# Altium PCB PCB1.PcbDoc (part 1 of 2)
Units mm, origin at the board's own origin, x right, y up, seen from the top; angles counter-clockwise.
Board outline 166.37 x 130.3 mm, 2 copper layers (Top Layer, Bottom Layer); 89 components, 70 nets, 277 pads, 63 vias.
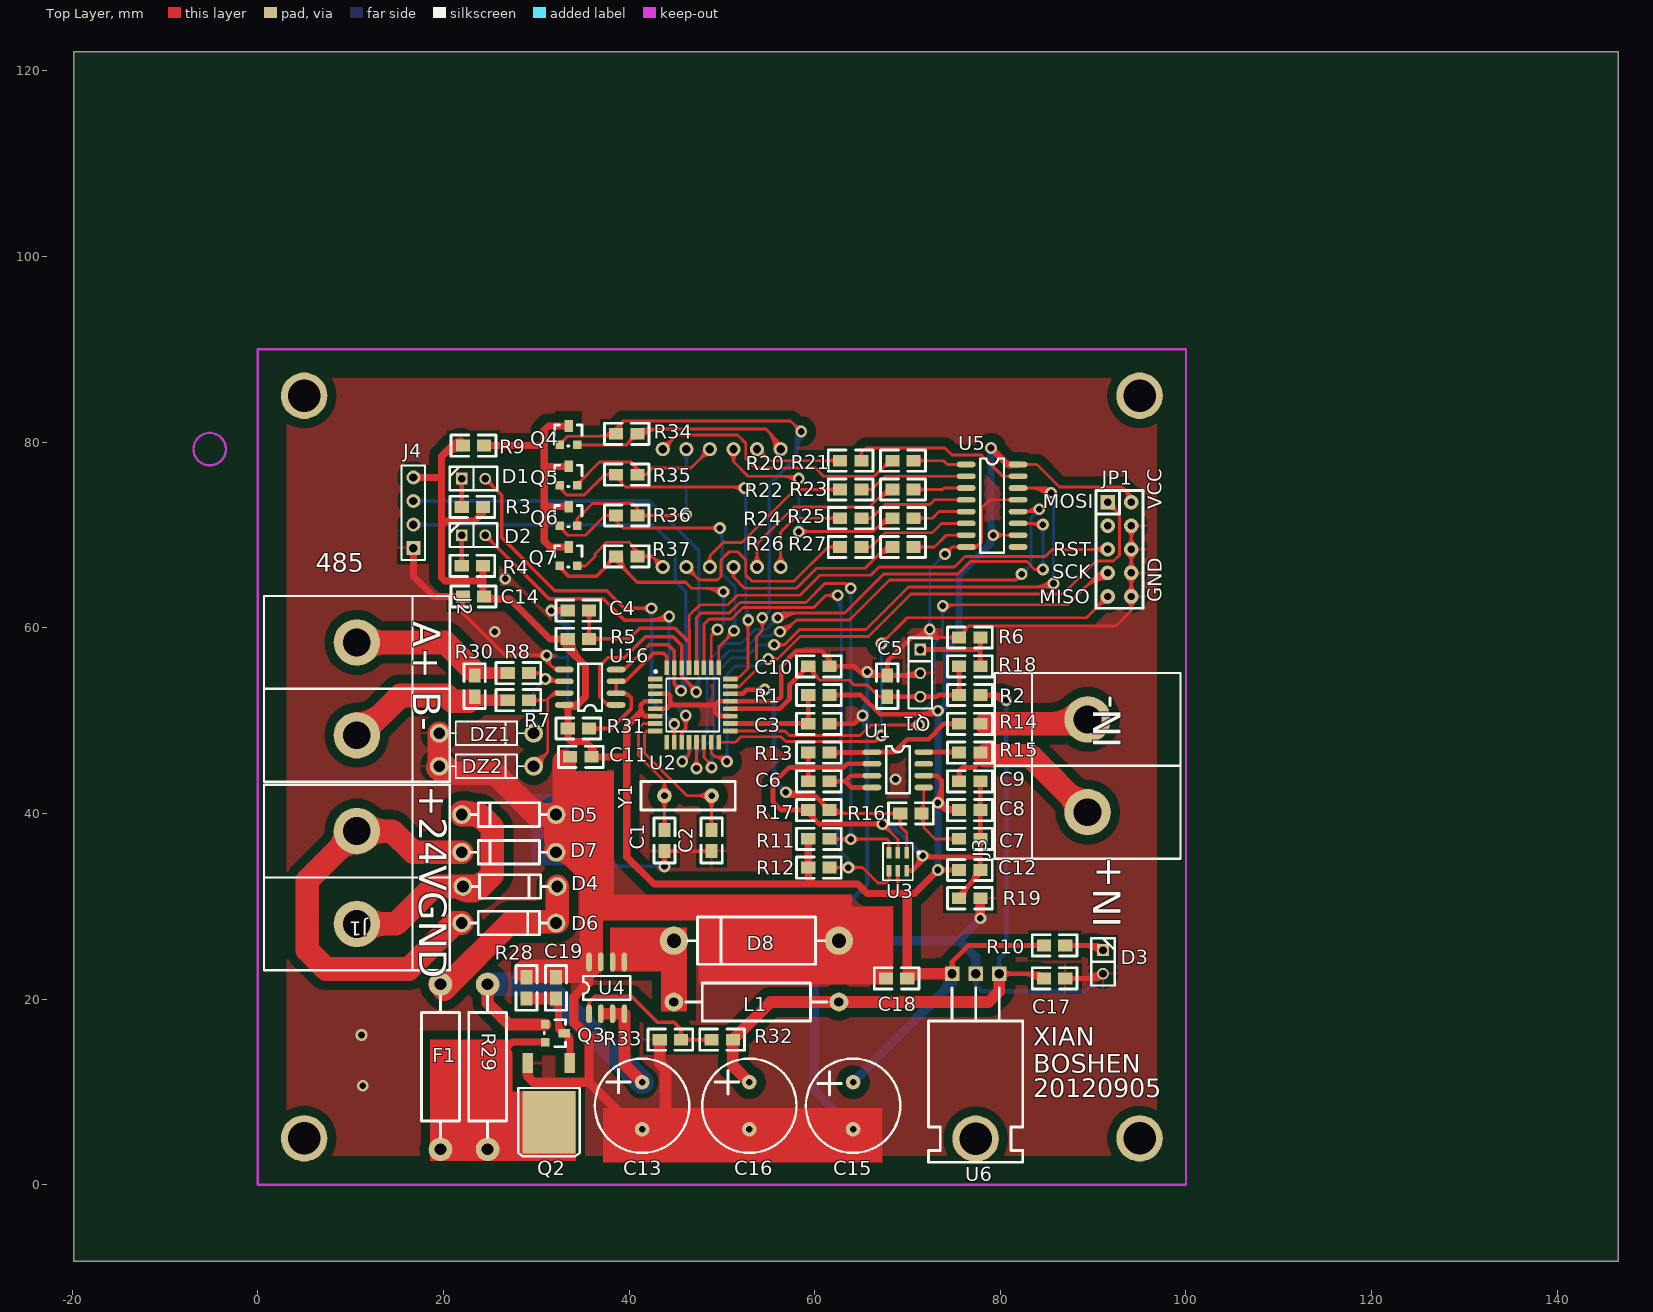
[diagram p0: Top Layer view]
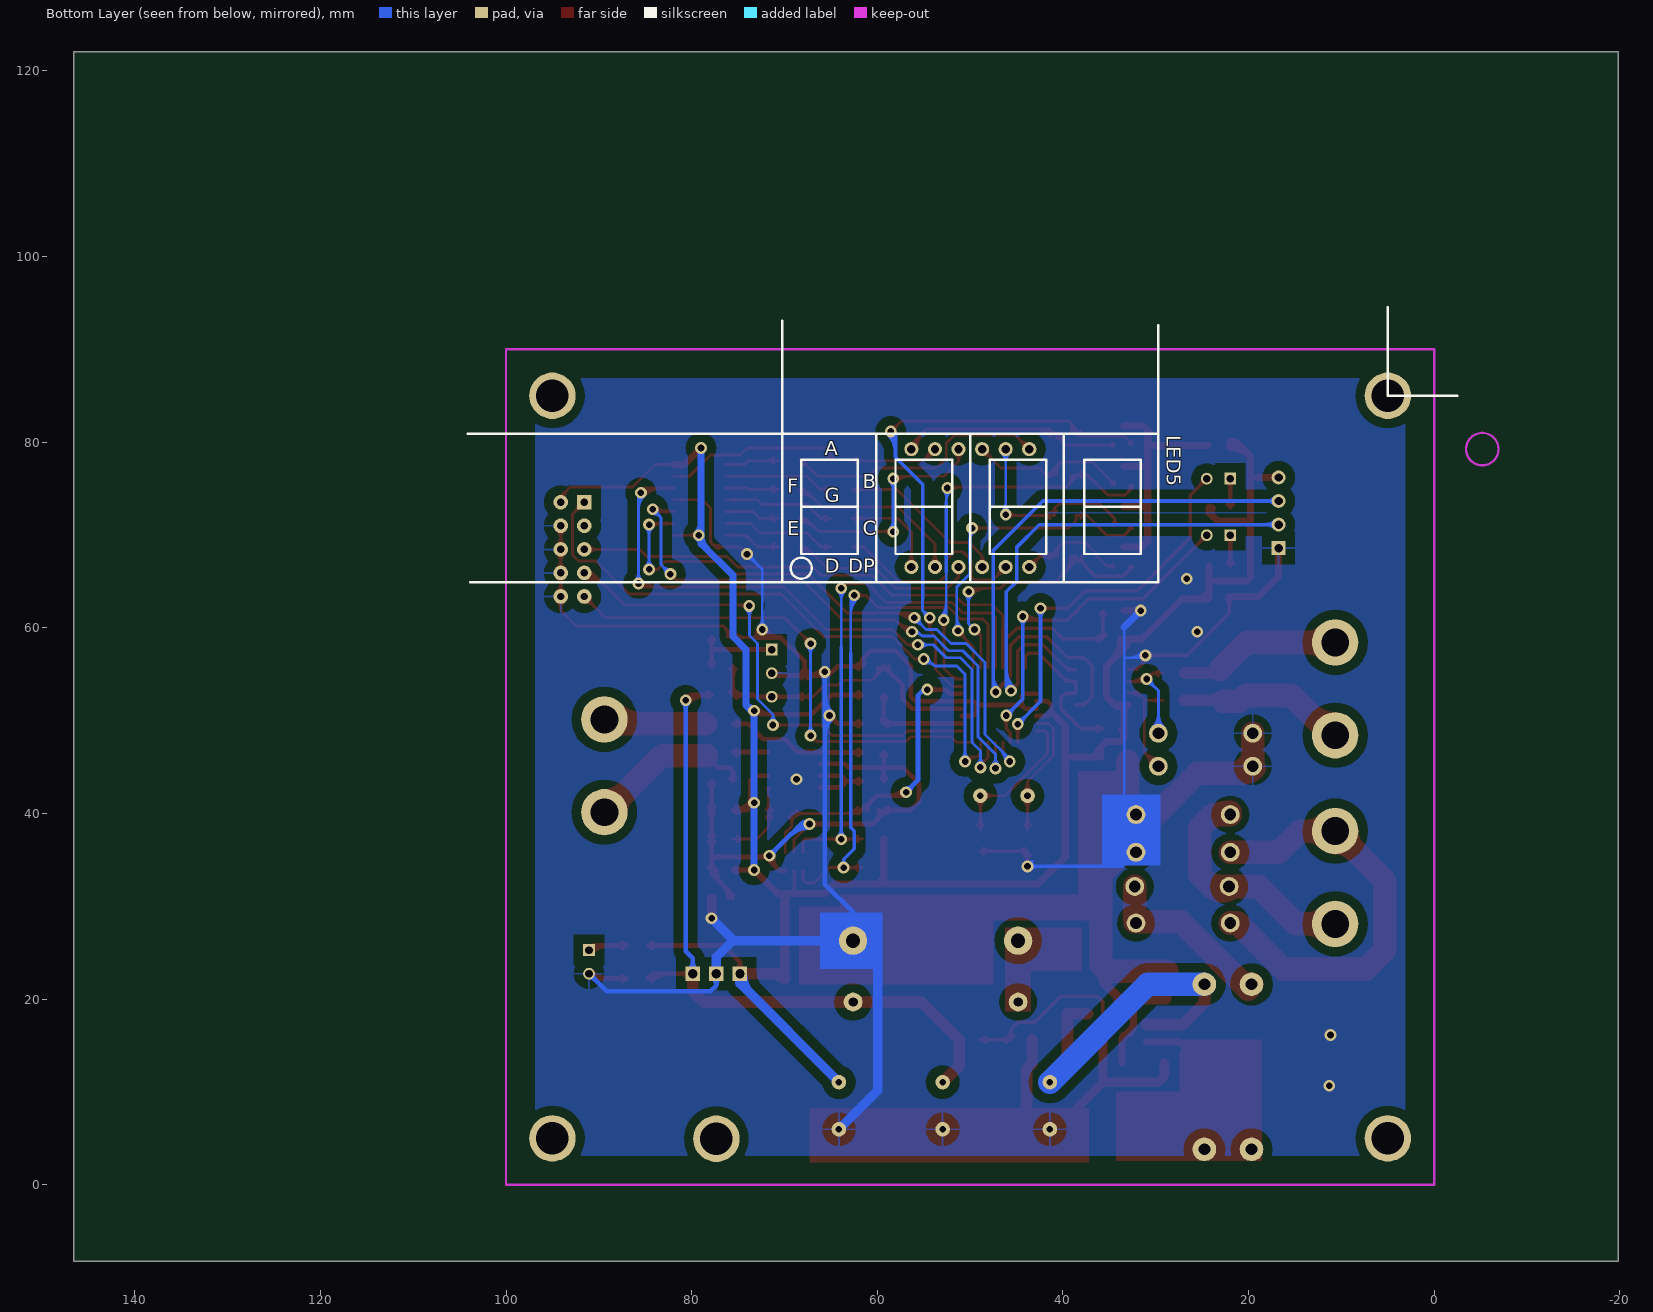
[diagram p1: Bottom Layer view, seen from below]

## Layer stack, top to bottom
Top Layer: signal copper 0.0356
Dielectric: dielectric 0.32, FR-4, Dk 4.8
Bottom Layer: signal copper 0.0356

## Board outline
-19.812,106.426 -19.812,-8.255 146.558,-8.255 146.558,122.047 -19.812,122.047

## Design rules (kind name [scope] priority, off if disabled: settings)
Clearance poly [(InPolygon)] p1: gap=1
Clearance Clearance_2 [All] p2: gap=0.254
ComponentClearance [All] p1: gap=0.254 collisioncheckmode=0
HoleSize [All] p1: absolutevalues=TRUE maxlimit=25.4 minlimit=0.025 maxpercent=80.000 minpercent=20.000
PolygonConnect [All] p1: connectstyle=Relief reliefconductorwidth=0.254 reliefentries=4 polygonreliefangle="90 Angle"
RoutingVias [All] p1: holewidth=0.711 width=1.27 viastyle="Through Hole" minholewidth=0.711 minwidth=1.27 maxholewidth=0.711 maxwidth=1.27
SolderMaskExpansion [All] p1: expansion=0.102
TestPointUsage [All] p1: valid=0 allowmultiple=FALSE
Testpoint [All] p1: side=15 testpointundercomponent=TRUE minsize=1.016 maxsize=2.54 preferedsize=1.524 minholesize=0 maxholesize=1.016 preferedholesize=0.813 testpointgrid=0.025 style=1023 order=-539222988
Width [All] p1: maxlimit=25.4 minlimit=0.305 preferedwidth=0.381 toplayer_prefwidth=0.762 bottomlayer_prefwidth=0.305 minimp=50.000000 maximp=50.000000 favimp=50.000000
16 further rules are at their usual default settings.

## Components (designator, comment, footprint, x,y, rotation, side; value= is the part's Value field where it differs from the comment)
C1 "15pF" 0805 43.815,35.941 r90 top
C2 "15pF" 0805 48.895,35.941 r90 top
C3 "0.1uF" 0805 59.309,49.657 r0 top
C4 "1uF" 0805 35.687,61.849 r180 top
C5 "0.1uF" 0805 67.818,52.578 r90 top
C6 "103" 0805 61.595,43.459 r180 top
C7 "104" 0805 75.565,37.262 r0 top
C8 "104" 0805 77.851,40.361 r180 top
C9 "104" 0805 75.565,43.459 r0 top
C10 "0.1uF" 0805 59.309,55.855 r0 top
C11 "103" 0805 33.655,46.101 r0 top
C12 "103" 0805 77.851,33.909 r180 top
C13 "10uF" RB.2/.4 41.402,11.049 r90 top
C14 "Cap" 0805 22.098,63.373 r0 top
C15 "10uF" RB.2/.4 64.135,11.049 r90 top
C16 "47uF" RB.2/.4 52.959,11.049 r90 top
C17 "104独石" 0805 86.995,22.225 r180 top
C18 "104独石" 0805 67.691,22.225 r0 top
C19 "0.01uF" 0805 32.131,20.066 r90 top
D1 "LED" SIP2 21.971,76.073 r0 top
D2 "LED" SIP2 21.971,69.977 r0 top
D3 "LED" SIP2 91.059,25.273 r270 top
D4 "1N4007" DIODE0.4 22.098,32.131 r0 top
D5 "1N4007" DIODE0.4 32.131,39.878 r180 top
D6 "1N4007" DIODE0.4 21.971,28.194 r0 top
D7 "1N4007" DIODE0.4 32.131,35.814 r180 top
D8 "5822" DIODE0.7 62.611,26.289 r180 top
DZ1 "P6KE10A" DIODE-0.4 24.638,48.641 r0 top
DZ2 "P6KE10A" DIODE-0.4 24.638,45.085 r0 top
F1 "1A" AXIAL0.7#1 19.685,3.81 r90 top
J1 "Power" duanzi 10.668,38.1 r270 top
J2 "485" duanzi 10.668,58.42 r270 top
J3 "4-20mA" duanzi 89.408,40.132 r90 top
J4 "Uart" HDR1X4 16.764,68.58 r90 top
JP1 "HEADER 5X2" IDC10 91.567,73.533 r270 top
L1 "22uH" AXIAL0.7#2 44.831,19.685 r0 top
LED5 "SR*410402" SR410402 70.231,64.897 r180 bottom
Q1 "431" sip3 71.374,57.658 r270 top
Q2 "IRFU024" TO-252AA 33.655,13.081 r180 top
Q3 "S8550LT1" SOT-23 30.988,17.272 r270 top
Q4 "SI2301" SOT-23 32.512,79.705 r0 top
Q5 "SI2301" SOT-23 32.512,75.362 r0 top
Q6 "SI2301" SOT-23 32.512,71.018 r0 top
Q7 "SI2301" SOT-23 32.512,66.675 r0 top
R1 "10uH" 0805 59.309,52.756 r0 top
R2 "1K" 0805 75.565,52.756 r0 top
R3 "1K" 0805 21.971,73.025 r0 top
R4 "1K" 0805 21.971,66.675 r0 top
R5 "10K" 0805 35.687,58.801 r180 top
R6 "1K" 0805 75.565,58.953 r0 top
R7 "100" 0805 26.924,52.197 r0 top
R8 "100" 0805 26.924,55.118 r0 top
R9 "0" 0805 22.098,79.629 r0 top
R10 "1K" 0805 86.995,25.781 r180 top
R11 "20K" 0805 61.595,37.262 r180 top
R12 "20K" 0805 61.595,34.163 r180 top
R13 "51" 0805 59.309,46.558 r0 top
R14 "5.1%0.1" 0805 75.565,49.657 r0 top
R15 "10" 0805 75.565,46.558 r0 top
R16 "5K" 0805 69.215,40.005 r0 top
R17 "5K" 0805 59.309,40.361 r0 top
R18 "0" 0805 75.565,55.855 r0 top
R19 "0" 0805 77.851,30.861 r180 top
R20 "200" 0805 65.024,78.003 r180 top
R21 "200" 0805 70.663,78.003 r180 top
R22 "200" 0805 65.024,74.905 r180 top
R23 "200" 0805 70.663,74.905 r180 top
R24 "200" 0805 65.024,71.806 r180 top
R25 "200" 0805 70.663,71.806 r180 top
R26 "200" 0805 65.024,68.707 r180 top
R27 "200" 0805 70.663,68.707 r180 top
R28 "10K" 0805 28.956,22.352 r270 top
R29 "1" AXIAL0.7#1 24.765,21.59 r270 top
R30 "120" 0805 23.368,52.578 r90 top
R31 "10K" 0805 35.687,49.149 r180 top
R32 "1K" 0805 48.895,15.621 r0 top
R33 "1K" 0805 43.307,15.621 r0 top
R34 "NC" 0805 38.608,80.899 r0 top
R35 "NC" 0805 38.608,76.496 r0 top
R36 "NC" 0805 38.608,72.094 r0 top
R37 "NC" 0805 38.608,67.691 r0 top
U1 "AD8200-YR" so-8 66.167,46.609 r0 top
U2 "ATmega8-16AC" 32A 46.863,51.689 r0 top
U3 "ADS1110A0" SO-G6/X.5 68.961,34.798 r180 top
U4 "DB1513" SO-8 35.687,18.415 r90 top
U5 "MC74HC595D" SO-16 76.327,77.597 r0 top
U6 "LM7805" TO-220 79.883,22.733 r180 top
U16 "MAX485ESA" SO-8 38.608,51.689 r180 top
Y1 "8M" XTAL1 48.895,41.91 r180 top

## Footprints (in the part's own frame and the unit in brackets; to place one, negate y for a bottom-side part, rotate by r counter-clockwise, add the part's x,y. Pads: shape width x height; smd on the part's side, far side on the other; paste and mask are expansions set on the pad)
32A [mm] "QFP; 32 Leads; Body 7 x 7 mm; Pitch 0.8 mm"
  rect 1.55x0.5 smd: 1(-4.025,2.8) 2(-4.025,2) 3(-4.025,1.2) 4(-4.025,0.4) 5(-4.025,-0.4) 6(-4.025,-1.2) 7(-4.025,-2) 8(-4.025,-2.8) 17(4.025,-2.8) 18(4.025,-2) 19(4.025,-1.2) 20(4.025,-0.4) 21(4.025,0.4) 22(4.025,1.2) 23(4.025,2) 24(4.025,2.8)
  rect 0.5x1.55 smd: 9(-2.8,-4.025) 10(-2,-4.025) 11(-1.2,-4.025) 12(-0.4,-4.025) 13(0.4,-4.025) 14(1.2,-4.025) 15(2,-4.025) 16(2.8,-4.025) 25(2.8,4.025) 26(2,4.025) 27(1.2,4.025) 28(0.4,4.025) 29(-0.4,4.025) 30(-1.2,4.025) 31(-2,4.025) 32(-2.8,4.025)
  silkscreen extent -4.12,-2.85 2.85,3.72
0805 [mil]
  rect 60x50 smd: 1(0,0) 2(90,0)
  silkscreen extent -50,-45 140,45
AXIAL0.7#1 [mm]
  round 2.54 hole 1.27: 1(0,0) 2(17.78,0)
  silkscreen extent 1.27,-2.03 16.51,2.03
AXIAL0.7#2 [mm]
  round 2.032 hole 1.016: 1(0,0) 2(17.78,0)
  silkscreen extent 1.27,-2.03 16.51,2.03
DIODE0.4 [mil]
  round 80 hole 50: 1(0,0) 2(400,0)
  silkscreen extent 40,-50 360,50
DIODE0.7 [mil]
  round 120 hole 60: 1(0,0) 2(700,0)
  silkscreen extent 60,-100 640,100
DIODE-0.4 [mil]
  round 80 hole 50: 1(-200,0) 2(200,0)
  silkscreen extent -160,-50 160,50
duanzi [mm]
  round 5 hole 3: 1(0,0) 2(10,0)
  silkscreen extent -5,-10 15,10
HDR1X4 [mm] "Connector; Header; 4 Position"
  rect 1.5x1.5 hole 0.9: 1(0,0)
  round 1.5 hole 0.9: 2(2.54,0) 3(5.08,0) 4(7.62,0)
  silkscreen extent -1.27,-1.27 8.89,1.27
IDC10 [mil]
  rect 62x62 hole 31.5: 1(0,0)
  round 62 hole 31.5: 2(0,100) 3(100,0) 4(100,100) 5(200,0) 6(200,100) 7(300,0) 8(300,100) 9(400,0) 10(400,100)
  silkscreen extent -50,-50 450,150
RB.2/.4 [mil]
  round 62 hole 28: 1(0,0) 2(-200,0)
  silkscreen extent -300,-200 100,200
SIP2 [mil]
  rect 50x50 hole 32: 1(0,0)
  round 50 hole 32: 2(100,0)
  silkscreen extent -50,-50 150,50
sip3 [mil]
  rect 50x50 hole 32: 1(0,0)
  round 50 hole 32: 2(100,0) 3(200,0)
  silkscreen extent -50,-50 250,50
so-8 [mil]
  oval 80x24 smd: 1(0,0) 2(0,-50) 3(0,-100) 4(0,-150) 5(220,-150) 6(220,-100) 7(220,-50) 8(220,0)
  silkscreen extent 60,-175 160,25
SO-8 [mil]
  oval 80x24 smd: 1(0,0) 2(0,-50) 3(0,-100) 4(0,-150) 5(220,-150) 6(220,-100) 7(220,-50) 8(220,0)
  silkscreen extent 60,-175 160,25
SO-16 [mil]
  oval 80x24 smd: 1(0,0) 2(0,-50) 3(0,-100) 4(0,-150) 5(0,-200) 6(0,-250) 7(0,-300) 8(0,-350) 9(220,-350) 10(220,-300) 11(220,-250) 12(220,-200) 13(220,-150) 14(220,-100) 15(220,-50) 16(220,0)
  silkscreen extent 60,-375 160,25
SO-G6/X.5 [mm]
  rect 0.5x1.25 smd: 1(-0.95,-0.975) 2(0,-0.975) 3(0.95,-0.975) 4(0.95,0.975) 5(0,0.975) 6(-0.95,0.975)
  silkscreen extent -2.38,-2 1.6,2
SOT-23 [mil]
  rect 36x36 smd: 1(0,0) 2(75,0)
  rect 36x50 smd: 3(38,80)
  silkscreen extent -20,-5 95,85
SR410402 [mm]
  round 1.524 hole 0.9: 1(13.9,1.65) 2(16.44,1.65) 3(18.98,1.65) 4(21.52,1.65) 5(24.06,1.65) 6(26.6,1.65) 7(26.6,14.35) 8(24.06,14.35) 9(21.52,14.35) 10(18.98,14.35) 11(16.44,14.35) 12(13.9,14.35)
  silkscreen extent 0,0 40.5,16
TO-220 [mm]
  round 5 hole 3.5: 0(2.54,17.78)
  rect 1.575x1.575 hole 1: 1(0,0) 2(2.54,0) 3(5.08,0)
  silkscreen extent -2.54,1.52 7.62,20.32
TO-252AA [mil]
  rect 45x85 smd: 1(1,-1) 3(180,-1)
  rect 225x265 smd: 2(90,250)
  silkscreen extent -40,105 220,395
XTAL1 [mil]
  round 62 hole 28: 1(0,0) 2(200,0)
  silkscreen extent -100,-60 300,60

## Part data
C1 C2 C3 C4 C5 C6 C7 C8 C9 C10 C12 C17 C18 C19: library part CAP, "Capacitor"
C11: library part Cap, "Capacitor"
C13 C15 C16: library part ELECTRO1, "Electrolytic Capacitor"
C14: "Capacitor"
D4 D5 D6 D7 D8: library part DIODE, "Diode"
DZ1 DZ2: library part ZENER2, "Zener Diode"
F1: library part "THERMAL FUSE"
J1: library part CON4, "Connector"
J2 J3: library part Buzzer, "Magnetic Transducer Buzzer"
J4: library part "Header 4", "Header, 4-Pin"
L1: library part INDUCTOR1
LED5: library part LED4-8A, "Seven-Segment Display, Right Hand Decimal"
Q1: library part SCR
Q2: library part NMOS-GSD
Q3: library part PNP, "PNP Transistor"
R1 R2 R3 R4 R5 R6 R7 R8 R9 R10 R11 R12 R16 R17 R18 R19 R28 R29 R30 R31 R32 R33 R34 R35 R36 R37: library part RES2
R13 R14 R15: library part res2
R20 R21 R22 R23 R24 R25 R26 R27: library part R
U1: library part ad8200
U2: "8-Bit AVR Microcontroller with 8K Bytes of In-System Programmable Flash Memory"
U3: library part ADS1110
U5: library part MC74HC595AN, "8-Bit Serial-Input/Serial or Prallel-Output Shift Register with Latched 3-State Outputs"
U6: library part VOLTREG
U16: library part Pro91A3.TMP_MAX1487E_10
Y1: library part CRYSTAL, "Crystal"

## Free pads (board coordinates)
  round 5 hole 3.5: 2(5,5) 2(5,85) 2(95,5) 2(95,85)

## Via types
v1: diameter 1.27, hole 0.711, Top Layer to Bottom Layer, 63 vias

## Nets (pads, with @x,y where several pads share a name; then routed paths per layer and width w, separated by ;. In a path a pad name is that pad's centre, name@x,y a point inside that pad or via, vN(x,y) a via of type N, cw(c..) or ccw(c..) an arc to the next point about the centre after c; other vN are vias at no path point)
+9: C16.1 C17.2 L1.2 R2.2 R32.2 U6.1 | length 90.7
  Top Layer w0.508: R2.2@77.851,52.756 80.086,52.756 ; R2.2@78.247,52.486 cw(c78.898,51.836) 78.898,52.756 cw(c78.898,53.676) R2.2@78.247,53.025 ; R2.2@78.376,52.756 cw(c78.376,49.928) v1@80.376,51.928 ; 79.603,52.756 cw(c79.603,51.155) v1@80.735,52.287 ; U6.1@79.883,22.733 84.201,22.733 C17.2@84.709,22.225 ; U6.1@80.26,22.356 cw(c81.171,21.445) 81.171,22.733 cw(c81.171,24.021) U6.1@80.26,23.11 ; v1@80.266,52.24 ccw(c79.641,52.311) 80.086,52.756 ; v1@80.602,52.576 cw(c80.531,53.201) 80.086,52.756 ; v1(80.645,52.197) 80.086,52.756 ; 82.436,22.733 cw(c82.436,20.079) C17.2@84.313,21.956 ; 83.662,22.733 cw(c83.662,21.305) C17.2@84.672,22.315
  Top Layer w1.27: C16.1@52.959,11.049 51.181,12.827 R32.2@51.181,15.621 55.245,19.685 L1.2@62.611,19.685 78.74,19.685 79.883,20.828 U6.1@79.883,22.733
  Bottom Layer w0.508: U6.1@79.506,23.11 ccw(c78.595,24.021) 79.883,24.021 ccw(c81.171,24.021) U6.1@80.26,23.11 ; U6.1@79.883,22.733 79.883,24.384 80.645,25.146 v1(80.645,52.197) ; v1@80.376,51.928 cw(c79.725,51.277) 80.645,51.277 cw(c81.565,51.277) v1@80.914,51.928
A3: LED5.11 R20.2 | length 13.6
  Top Layer w0.305: LED5.11@53.791,78.637 cw(c53.791,77.166) 54.832,78.206 cw(c55.872,79.247) LED5.11@54.401,79.247 ; LED5.11@53.791,79.247 55.035,78.003 R20.2@62.738,78.003 ; R20.2@62.27,77.662 ccw(c61.446,76.838) 61.446,78.003 ccw(c61.446,79.169) R20.2@62.27,78.345
ADC: R16.1 R17.2 U2.22 U3.1 | length 48.3
  Top Layer w0.305: R17.2@61.595,40.361 61.951,40.005 R16.1@69.215,40.005 69.215,38.608 69.911,37.912 U3.1@69.911,35.773 ; R17.2@61.632,40.271 ccw(c62.274,40.912) R17.2@62.274,40.005 ; R17.2@61.848,40.486 ccw(c63.01,41.648) 63.01,40.005 ; R17.2@62.063,40.702 ccw(c63.746,42.384) 63.746,40.005 ; R16.1@68.747,39.664 ccw(c67.923,38.84) 67.923,40.005 ccw(c67.923,41.17) R16.1@68.747,40.346 ; R16.1@68.874,39.664 cw(c68.05,38.84) 69.215,38.84 cw(c70.38,38.84) R16.1@69.556,39.664
  Top Layer w0.508: U2.22@50.888,52.889 52.254,52.889 52.705,53.34 v1(54.61,53.34) ; v1@54.341,53.071 ccw(c53.69,52.42) 53.69,53.34 ccw(c53.69,54.26) v1@54.341,53.609 ; v1@56.806,42.201 ccw(c57.509,42.904) 57.509,41.91 ; v1(56.896,42.291) 57.023,42.291 57.404,41.91 60.046,41.91 R17.2@61.595,40.361 ; v1@57.165,42.56 ccw(c58.736,44.131) 58.736,41.91 ; 60.728,41.228 cw(c59.861,40.361) R17.2@61.087,40.361 ; R17.2@61.034,40.921 ccw(c61.468,41.355) R17.2@61.468,40.742
  Bottom Layer w0.508: v1(54.61,53.34) 54.991,53.34 55.626,52.705 55.626,43.561 v1(56.896,42.291) ; v1@56.515,42.291 ccw(c55.595,42.291) 56.246,42.941 ccw(c56.896,43.592) v1@56.896,42.672
AGND: C6.2 C7.2 C8.1 C9.2 C12.1 R13.1 R17.1 R19.2 U1.2 U3.2 U3.6 | length 95.1
  Top Layer w0.305: v1@67.31,38.379 cw(c67.31,37.214) 68.134,38.038 cw(c68.958,38.862) v1@67.793,38.862 ; v1(67.31,38.862) 68.961,37.211 U3.2@68.961,35.773
  Top Layer w0.508: R17.1@58.913,40.091 ccw(c58.262,39.441) 58.262,40.361 ccw(c58.262,41.28) R17.1@58.913,40.63 ; C6.2@59.04,43.729 ccw(c58.389,44.379) 59.309,44.379 ccw(c60.229,44.379) C6.2@59.578,43.729 ; R13.1@59.04,46.289 cw(c58.389,45.638) 59.309,45.638 cw(c60.229,45.638) R13.1@59.578,46.289 ; C6.2@59.309,43.459 59.309,44.958 ; R13.1@59.309,46.558 59.309,45.085 59.436,44.958 ; R17.1@59.813,40.305 ccw(c61.207,40.1) 60.211,39.103 ; U1.2@66.167,45.339 63.5,45.339 63.119,44.958 57.277,44.958 55.499,43.18 55.499,41.275 56.413,40.361 R17.1@59.309,40.361 59.309,40.005 60.452,38.862 v1(67.31,38.862) ; v1@67.041,38.593 ccw(c66.39,37.942) 66.39,38.862 ccw(c66.39,39.782) v1@67.041,39.131 ; U3.6@69.911,33.823 70.526,33.823 72.009,35.306 77.724,35.306 77.851,35.433 ; 70.78,34.077 ccw(c69.628,35.229) v1@71.249,35.394 ; v1@71.897,35.702 ccw(c72.854,36.659) 72.854,35.306 ; 75.834,31.511 ccw(c76.485,30.861) R19.2@75.565,30.861 75.565,31.242 77.851,33.528 C9.2@77.851,43.459 ; R19.2@76.073,30.861 cw(c78.219,30.861) 76.702,32.379 ; 76.714,32.391 ccw(c75.197,33.909) C12.1@77.343,33.909 ; 77.582,33.259 ccw(c76.931,33.909) C12.1@77.851,33.909 ; C12.1@77.582,34.178 ccw(c76.931,34.829) 77.851,34.829 ccw(c78.771,34.829) C12.1@78.12,34.178 ; C7.2@77.582,36.992 cw(c76.931,36.342) 77.851,36.342 cw(c78.771,36.342) C7.2@78.12,36.992 ; C7.2@77.582,37.531 ccw(c76.931,38.182) 77.851,38.182 ccw(c78.771,38.182) C7.2@78.12,37.531 ; C8.1@77.582,40.091 cw(c76.931,39.441) 77.851,39.441 cw(c78.771,39.441) C8.1@78.12,40.091 ; C8.1@77.582,40.63 ccw(c76.931,41.28) 77.851,41.28 ccw(c78.771,41.28) C8.1@78.12,40.63 ; C9.2@77.582,43.19 cw(c76.931,42.54) 77.851,42.54 cw(c78.771,42.54) C9.2@78.12,43.19
  Bottom Layer w0.508: v1@67.242,38.969 cw(c67.654,38.323) 68.196,38.865 ; v1@67.31,38.481 cw(c67.31,35.415) 69.478,37.583 ; v1(67.31,38.862) 68.199,38.862 ; v1@67.31,38.989 cw(c67.31,37.149) 68.611,38.45 ; v1@67.515,38.541 cw(c68.002,37.777) 68.643,38.418 ; v1@67.586,38.599 cw(c68.199,38.015) 68.199,38.862 ; v1@67.586,39.125 ccw(c68.199,39.709) 68.199,38.862 ; v1@71.247,35.433 ccw(c70.327,35.433) 70.978,36.083 ccw(c71.628,36.734) v1@71.628,35.814 ; v1(71.628,35.433) 68.199,38.862
B3: LED5.7 R21.2 | length 33.6
  Top Layer w0.305: LED5.7@43.631,79.247 45.156,80.772 51.689,80.772 52.578,79.883 52.578,78.232 53.594,77.216 60.071,77.216 60.96,76.327 66.421,76.327 68.097,78.003 R21.2@68.377,78.003 ; LED5.7@43.631,79.857 ccw(c43.631,81.328) 44.672,80.288 ccw(c45.712,79.247) LED5.7@44.241,79.247 ; 67.166,77.072 cw(c68.25,75.988) R21.2@68.25,77.521 ; 67.534,77.44 ccw(c66.97,78.003) R21.2@67.767,78.003 ; R21.2@67.686,77.592 cw(c68.25,77.028) R21.2@68.25,77.826
C3: LED5.4 R22.2 | length 21.7
  Top Layer w0.305: LED5.4@48.347,67.036 ccw(c47.807,67.761) 48.711,67.761 ; LED5.4@48.711,66.547 48.711,67.761 ; LED5.4@49.075,67.036 cw(c49.615,67.761) 48.711,67.761 ; R22.2@62.27,74.563 ccw(c61.446,73.739) 61.446,74.905 ccw(c61.446,76.07) R22.2@62.27,75.246 ; R22.2@62.738,74.905 57.887,74.905 52.173,69.191 50.141,69.191 48.711,67.761
D3: LED5.2 R23.2 | length 24.8
  Top Layer w0.305: LED5.2@53.36,66.978 ccw(c52.319,68.019) 53.791,68.019 ccw(c55.263,68.019) LED5.2@54.222,66.978 ; LED5.2@53.791,66.547 53.791,69.031 57.785,73.025 65.913,73.025 67.793,74.905 R23.2@68.377,74.905 ; 66.645,73.757 cw(c68.25,72.153) R23.2@68.25,74.422 ; 67.166,74.278 cw(c68.25,73.194) R23.2@68.25,74.727
D_1: LED5.12 Q4.2 R34.2 | length 37.5
  Top Layer w0.305: Q4.2@34.417,79.705 39.7,79.705 41.402,81.407 54.737,81.407 56.331,79.813 LED5.12@56.331,79.247 ccw(c54.965,79.247) 55.931,80.213 ; Q4.2@34.633,79.49 cw(c35.153,78.969) 35.153,79.705 cw(c35.153,80.441) Q4.2@34.633,79.921 ; 39.853,79.858 ccw(c38.813,80.899) R34.2@40.284,80.899 ; 40.16,80.165 cw(c40.767,79.558) R34.2@40.767,80.416 ; R34.2@40.374,80.379 ccw(c39.853,80.899) R34.2@40.589,80.899 ; R34.2@40.931,80.989 cw(c41.941,79.979) 41.941,81.407 ; R34.2@41.147,80.773 cw(c42.677,79.243) 42.677,81.407 ; R34.2@41.362,80.558 cw(c43.413,78.507) 43.413,81.407 ; 54.89,81.254 cw(c52.883,79.247) LED5.12@55.721,79.247 ; 55.41,80.734 cw(c53.924,79.247) LED5.12@56.026,79.247
D_2: LED5.9 Q5.2 R35.2 | length 26.6
  Top Layer w0.305: Q5.2@34.417,75.362 34.417,75.438 36.83,77.851 40.259,77.851 40.894,77.216 ; Q5.2@34.417,75.667 ccw(c34.417,76.218) 34.807,75.828 ; Q5.2@34.722,75.362 cw(c35.642,75.362) 34.991,76.012 ; 40.218,77.892 cw(c39.207,76.882) R35.2@40.594,76.539 ; 40.599,77.511 cw(c39.819,76.731) R35.2@40.89,76.466 ; R35.2@40.711,76.943 ccw(c40.599,77.216) 40.894,77.216 ; R35.2@40.981,77.129 cw(c40.432,76.579) R35.2@41.186,76.393 ; R35.2@41.077,76.943 cw(c41.189,77.216) 40.894,77.216 ; R35.2@41.447,76.269 cw(c41.825,76.067) 41.825,76.496 ; R35.2@41.447,76.723 ccw(c41.825,76.925) 41.825,76.496 ; LED5.9@48.101,79.247 cw(c46.63,79.247) 47.67,78.206 cw(c48.711,77.166) LED5.9@48.711,78.637 ; LED5.9@48.711,79.826 LED5.9@48.711,79.247 46.68,77.216 42.545,77.216 41.825,76.496 ; 40.894,77.216 R35.2@40.894,76.496 41.825,76.496
D_3: LED5.8 Q6.2 R36.2 | length 31.8
  Top Layer w0.305: Q6.2@34.201,71.234 ccw(c33.681,71.754) 34.417,71.754 ccw(c35.153,71.754) Q6.2@34.633,71.234 ; Q6.2@34.417,71.018 34.417,71.755 36.068,73.406 40.386,73.406 40.894,72.898 ; R36.2@40.667,72.519 ccw(c40.465,72.898) 40.894,72.898 ; R36.2@41.121,72.519 cw(c41.323,72.898) 40.894,72.898 ; R36.2@41.362,71.752 cw(c42.186,70.929) 42.186,72.094 cw(c42.186,73.259) R36.2@41.362,72.435 ; 44.766,72.094 ccw(c44.766,73.598) v1@45.83,72.534 ; 45.246,72.094 cw(c45.246,71.268) v1@45.83,71.852 ; 45.502,72.094 ccw(c45.502,72.862) v1@46.045,72.319 ; v1(46.171,72.193) 46.072,72.094 R36.2@40.894,72.094 40.894,72.898
  Bottom Layer w0.305: LED5.8@45.74,78.816 cw(c44.699,77.775) 46.171,77.775 cw(c47.643,77.775) LED5.8@46.602,78.816 ; v1@45.83,72.534 ccw(c45.006,73.358) 46.171,73.358 ccw(c47.336,73.358) v1@46.512,72.534 ; v1(46.171,72.193) LED5.8@46.171,79.247
D_4: LED5.6 Q7.2 R37.2 | length 19.6
  Top Layer w0.305: Q7.2@34.417,66.675 35.306,66.675 36.322,67.691 36.322,67.945 37.592,69.215 40.005,69.215 40.894,68.326 R37.2@40.894,67.691 ; Q7.2@34.633,66.459 cw(c35.153,65.939) 35.153,66.675 cw(c35.153,67.411) Q7.2@34.633,66.891 ; 40.079,69.141 cw(c38.823,67.886) R37.2@40.59,67.709 ; 40.534,68.686 cw(c39.65,67.803) R37.2@40.893,67.678
  Top Layer w0.381: R37.2@40.894,67.691 42.487,67.691 LED5.6@43.631,66.547 ; R37.2@41.335,67.377 cw(c42.094,66.618) 42.094,67.691 cw(c42.094,68.764) R37.2@41.335,68.005 ; LED5.6@43.06,66.547 ccw(c41.68,66.547) 42.655,67.523 ccw(c43.631,68.498) LED5.6@43.631,67.118
DP3: LED5.3 R27.2 | length 26.1
  Top Layer w0.305: LED5.3@50.934,66.026 cw(c50.59,65.462) 51.251,65.462 ; LED5.3@51.251,66.547 51.251,65.462 ; LED5.3@51.568,66.026 ccw(c51.912,65.462) 51.251,65.462 ; 66.472,67.488 cw(c68.25,65.71) R27.2@68.25,68.224 ; 66.992,68.008 cw(c68.25,66.751) R27.2@68.25,68.529 ; 67.513,68.529 cw(c68.25,67.792) R27.2@68.25,68.834 ; R27.2@68.377,68.707 67.691,68.707 65.405,66.421 60.198,66.421 58.039,64.262 52.451,64.262 51.251,65.462
DUAN1: Q4.1 R34.1 U2.23 | length 76.8
  Top Layer w0.305: Q4.1@32.512,79.705 32.512,79.756 33.401,80.645 38.354,80.645 R34.1@38.608,80.899 38.608,81.534 39.37,82.296 ; Q4.1@32.512,80.01 ccw(c32.512,80.623) 32.946,80.19 ; Q4.1@32.817,79.705 cw(c33.675,79.705) 33.068,80.312 ; 36.703,80.645 ccw(c36.703,82.677) R34.1@38.14,81.24 ; 37.439,80.645 ccw(c37.439,81.941) R34.1@38.355,81.025 ; R34.1@38.621,80.844 cw(c39.287,81.166) 38.764,81.69 ; R34.1@38.895,80.976 cw(c39.696,81.364) 39.067,81.993 ; R34.1@39.169,81.109 cw(c40.104,81.562) 39.37,82.296 ; U2.23@50.888,53.689 51.911,53.689 53.721,55.499 53.721,59.055 54.356,59.69 v1(54.356,61.087) ; v1@54.015,60.746 cw(c53.191,59.922) 54.356,59.922 cw(c55.521,59.922) v1@54.697,60.746 ; v1@58.064,81.153 ccw(c56.899,81.153) 57.723,81.977 ccw(c58.547,82.801) v1@58.547,81.636 ; v1(58.547,81.153) 57.404,82.296 39.37,82.296
  Bottom Layer w0.305: v1(54.356,61.087) 55.118,61.849 ; v1@54.383,61.569 ccw(c54.438,62.529) 55.118,61.849 ; v1@54.838,61.114 cw(c55.798,61.169) 55.118,61.849 ; 55.118,63.119 55.118,61.849
  Bottom Layer w0.381: 55.118,63.119 55.118,75.438 58.039,78.359 58.039,80.645 ; 58.039,78.853 cw(c60.847,78.853) v1@58.861,80.839 ; 58.039,79.773 cw(c59.927,79.773) v1@58.592,81.108 ; 58.039,80.693 cw(c59.007,80.693) v1@58.322,81.378 ; v1@58.125,81.012 cw(c57.786,80.898) 58.039,80.645 ; v1@58.406,80.731 ccw(c58.292,80.392) 58.039,80.645 ; v1(58.547,81.153) 58.039,80.645
DUAN2: Q5.1 R35.1 U2.24 | length 59.8
  Top Layer w0.305: 32.675,74.894 cw(c33.078,75.297) Q5.1@32.512,75.362 ; Q5.1@32.69,75.362 Q5.1@32.512,75.362 ; Q5.1@32.815,75.327 ccw(c33.879,75.205) 33.122,74.447 ; R35.1@38.126,76.169 ccw(c37.38,75.483) 37.38,76.496 ; R35.1@38.126,76.823 cw(c37.38,77.51) 37.38,76.496 ; R35.1@38.439,76.327 R35.1@38.608,76.496 ; R35.1@38.903,76.439 ccw(c39.545,76.221) 39.066,75.742 ; R35.1@39.192,76.341 ccw(c40.062,76.046) 39.412,75.396 ; U2.24@50.888,54.489 51.695,54.489 52.832,55.626 v1(52.832,60.833) ; 50.979,75.184 cw(c50.979,73.585) v1@52.11,74.716 ; U2.24@51.413,54.587 ccw(c51.413,55.503) 52.061,54.855 ; 51.593,75.184 ccw(c51.593,75.915) v1@52.11,75.398 ; 51.715,75.184 cw(c51.715,74.321) v1@52.325,74.931 ; v1(52.451,75.057) 52.324,75.184 39.624,75.184 38.608,76.2 R35.1@38.608,76.496 ; v1@52.491,60.492 cw(c51.667,59.668) 52.832,59.668 cw(c53.997,59.668) v1@53.173,60.492 ; Q5.1@32.512,75.362 32.512,75.057 33.274,74.295 35.179,74.295 37.38,76.496 ; 37.38,76.496 R35.1@38.608,76.496
  Bottom Layer w0.305: v1@52.11,74.716 cw(c50.979,73.585) 52.578,73.585 ; v1@52.325,74.931 cw(c51.715,74.321) 52.578,74.321 ; v1(52.451,75.057) 52.578,74.93 52.578,73.533 ; 52.578,61.875 ccw(c53.874,61.875) v1@52.958,60.959 ; 52.578,62.611 ccw(c54.61,62.611) v1@53.173,61.174 ; 52.578,66.04 52.578,61.087 v1(52.832,60.833) ; 52.578,74.199 cw(c53.309,74.199) v1@52.792,74.716
  Bottom Layer w0.381: 52.578,66.04 52.578,73.533
DUAN3: Q6.1 R36.1 U2.25 | length 47.6
  Top Layer w0.305: Q6.1@32.512,70.714 cw(c32.512,70.346) Q6.1@32.772,70.606 ; Q6.1@32.512,71.018 32.537,71.018 32.537,70.841 33.401,69.977 35.306,69.977 37.423,72.094 ; Q6.1@32.817,71.018 ccw(c33.921,71.018) 33.14,70.238 ; R36.1@38.117,71.777 ccw(c37.423,71.175) 37.423,72.094 ; R36.1@38.117,72.41 cw(c37.423,73.013) 37.423,72.094 ; R36.1@38.523,72.009 R36.1@38.608,72.094 ; v1@49.443,70.398 ccw(c48.619,69.574) 48.619,70.739 ccw(c48.619,71.904) v1@49.443,71.08 ; U2.25@49.663,55.714 49.663,57.918 51.435,59.69 v1(51.308,59.69) ; v1(49.784,70.739) 39.37,70.739 38.608,71.501 R36.1@38.608,72.094 ; 50.394,58.649 ccw(c49.354,59.69) v1@50.825,59.69 ; 50.701,58.956 cw(c51.308,58.349) v1@51.308,59.207 ; 50.915,59.17 ccw(c50.394,59.69) v1@51.13,59.69 ; 37.423,72.094 R36.1@38.608,72.094
  Bottom Layer w0.305: v1@49.537,70.324 cw(c49.014,69.444) 50.038,69.444 ; v1@49.693,70.586 cw(c49.332,69.98) 50.038,69.98 ; v1(49.784,70.739) 50.038,70.485 50.038,69.469 ; 50.038,67.056 50.038,65.786 51.435,64.389 51.435,59.817 v1(51.308,59.69) ; v1@50.967,60.031 ccw(c49.836,61.162) 51.435,61.162 ; v1@51.182,59.816 ccw(c50.572,60.426) 51.435,60.426 ; 51.435,60.548 ccw(c52.166,60.548) v1@51.649,60.031
  Bottom Layer w0.381: 50.038,67.056 50.038,69.469
DUAN4: Q7.1 R37.1 U2.26 | length 44
  Top Layer w0.305: Q7.1@32.512,66.548 Q7.1@32.512,66.675 ; R37.1@38.481,67.564 R37.1@38.608,67.691 ; 46.101,64.897 46.736,64.262 49.784,64.262 v1(50.165,63.881) ; 48.08,64.262 cw(c48.08,61.796) v1@49.824,63.54 ; 48.816,64.262 cw(c48.816,62.532) v1@50.039,63.755 ; U2.26@48.863,55.714 48.863,59.15 ; v1@49.054,59.74 cw(c48.382,59.631) 48.863,59.15 ; v1@49.453,59.341 ccw(c49.344,58.669) 48.863,59.15 ; v1(49.53,59.817) 48.863,59.15 ; 49.552,64.262 cw(c49.552,63.268) v1@50.255,63.971
  Top Layer w0.381: Q7.1@32.512,66.548 33.528,65.532 36.449,65.532 R37.1@38.608,67.691 38.608,67.183 40.894,64.897 46.101,64.897 ; Q7.1@32.779,66.675 ccw(c33.729,66.675) 33.057,66.003 ; 37.632,66.715 ccw(c36.657,67.691) R37.1@38.036,67.691 ; 37.939,67.022 cw(c38.481,66.48) R37.1@38.481,67.246 ; R37.1@38.798,67.691 ccw(c40.485,67.691) 39.292,66.499 ; R37.1@39.179,67.691 ccw(c41.786,67.691) 39.943,65.848
  Bottom Layer w0.305: v1(49.53,59.817) 50.165,60.452 ; v1@49.626,60.29 ccw(c49.745,60.872) 50.165,60.452 ; v1@49.824,63.54 cw(c49,62.716) 50.165,62.716 cw(c51.33,62.716) v1@50.506,63.54 ; v1@50.003,59.913 cw(c50.585,60.032) 50.165,60.452 ; v1(50.165,63.881) 50.165,60.452
E3: LED5.1 R24.2 | length 14.9
  Top Layer w0.305: LED5.1@55.9,66.978 ccw(c54.859,68.019) 56.331,68.019 ccw(c57.803,68.019) LED5.1@56.762,66.978 ; LED5.1@56.331,66.547 56.331,70.301 57.836,71.806 R24.2@62.738,71.806 ; R24.2@62.27,71.465 ccw(c61.446,70.641) 61.446,71.806 ccw(c61.446,72.971) R24.2@62.27,72.147
EN485: R31.1 U2.32 U16.2 U16.3 | length 22
  Top Layer w0.381: R31.1@35.687,49.149 38.1,49.149 40.259,51.308 40.259,52.451 39.751,52.959 U16.2@38.608,52.959 U16.3@38.608,54.229 39.624,54.229 42.672,57.277 43.688,57.277 44.063,56.902 U2.32@44.063,55.714 ; R31.1@36.128,48.835 cw(c36.887,48.076) 36.887,49.149 cw(c36.887,50.222) R31.1@36.128,49.463 ; U16.2@39.319,52.845 cw(c39.319,51.526) 40.251,52.459 ; U16.3@39.319,54.343 ccw(c39.319,55.355) 40.035,54.64 ; U16.2@39.366,52.855 cw(c39.585,52.361) 39.967,52.743
F3: LED5.10 R25.2 | length 39.5
  Top Layer w0.305: LED5.10@50.851,78.787 cw(c50.085,77.908) 51.251,77.908 ; LED5.10@51.251,79.247 51.251,77.908 ; LED5.10@51.651,78.787 ccw(c52.417,77.908) 51.251,77.908 ; 56.515,76.327 cw(c56.515,74.295) v1@57.952,75.732 ; 57.251,76.327 cw(c57.251,75.031) v1@58.167,75.947 ; v1(58.293,70.358) 66.294,70.358 67.742,71.806 R25.2@68.377,71.806 ; v1(58.293,76.073) 58.039,76.327 52.832,76.327 51.251,77.908 ; v1@58.634,70.017 cw(c59.458,69.193) 59.458,70.358 cw(c59.458,71.523) v1@58.634,70.699 ; 66.559,70.623 cw(c68.25,68.932) R25.2@68.25,71.323 ; 67.079,71.143 cw(c68.25,69.972) R25.2@68.25,71.628 ; 67.599,71.663 cw(c68.25,71.013) R25.2@68.25,71.933
  Bottom Layer w0.305: v1@57.952,70.699 ccw(c57.128,71.523) 58.293,71.523 ccw(c59.458,71.523) v1@58.634,70.699 ; v1@57.952,75.732 cw(c57.128,74.908) 58.293,74.908 cw(c59.458,74.908) v1@58.634,75.732 ; v1(58.293,70.358) v1(58.293,76.073)
G3: LED5.5 R26.2 | length 27.3
  Top Layer w0.305: LED5.5@46.171,65.937 cw(c46.171,64.466) 47.212,65.506 cw(c48.252,66.547) LED5.5@46.781,66.547 ; LED5.5@46.171,66.547 47.567,65.151 49.53,65.151 49.911,65.532 49.911,67.31 50.8,68.199 51.689,68.199 52.578,67.31 52.578,65.659 53.213,65.024 57.785,65.024 61.468,68.707 ; R26.2@62.265,68.37 ccw(c61.468,67.595) 61.468,68.707 ; R26.2@62.265,69.044 cw(c61.468,69.819) 61.468,68.707 ; R26.2@62.738,68.707 61.468,68.707
GND: C1.1 C2.1 C3.2 C4.2 C5.2 C10.2 C11.1 C13.2 C14.1 C15.2 C16.2 C17.1 C18.1 C19.2 D3.2 D5.1 D7.1 D8.1 DZ1.1 DZ2.1 J4.1 JP1.4 JP1.6 JP1.8 JP1.10 Q1.2 Q2.3 R6.1 R19.1 R28.1 R33.1 U2.3 U2.5 U2.19 U2.21 U4.7 U4.8 U5.8 U5.13 U6.2 U16.5 | length 508.7
  Top Layer w0.305: v1(31.115,57.023) 31.115,56.388 32.004,55.499 U16.5@33.02,55.499 ; v1@31.272,56.939 ccw(c31.895,56.607) 31.396,56.107 ; 31.528,55.975 ccw(c32.309,56.755) U16.5@32.309,55.651 ; v1@31.541,56.796 ccw(c32.274,56.404) 31.686,55.817 ; v1@72.39,59.334 cw(c72.39,58.169) 73.214,58.993 cw(c74.038,59.817) v1@72.873,59.817 ; v1(72.39,59.817) 73.254,58.953 R6.1@75.565,58.953 75.565,59.182 76.581,60.198 ; v1(74.041,67.945) 74.803,68.707 ; v1@74.068,68.427 ccw(c74.123,69.387) 74.803,68.707 ; v1@74.523,67.972 cw(c75.483,68.027) 74.803,68.707 ; R6.1@75.097,58.612 ccw(c74.273,57.788) 74.273,58.953 ccw(c74.273,60.119) R6.1@75.097,59.295 ; U5.8@75.508,68.599 ccw(c75.248,68.339) 75.248,68.707 ccw(c75.248,69.075) U5.8@75.508,68.815 ; R6.1@75.869,58.975 cw(c76.805,59.088) 76.138,59.755 ; R6.1@76.171,59.011 cw(c77.595,59.183) 76.581,60.198 ; U5.8@77.03,68.555 ccw(c77.064,69.165) 77.496,68.733 ; U5.8@77.047,68.859 ccw(c77.114,70.078) 77.978,69.215 ; U5.8@77.146,68.599 cw(c77.406,68.339) 77.406,68.707 cw(c77.406,69.075) U5.8@77.146,68.815 ; U5.13@81.096,73.679 ccw(c80.836,73.419) 80.836,73.787 ccw(c80.836,74.155) U5.13@81.096,73.895 ; U5.13@81.915,73.787 78.867,73.787 77.978,72.898 77.978,69.215 ; JP1.10@93.658,63.822 ccw(c92.574,64.906) 94.107,64.906 ccw(c95.64,64.906) JP1.10@94.556,63.822 ; JP1.8@93.658,65.464 cw(c92.574,64.38) 94.107,64.38 cw(c95.64,64.38) JP1.8@94.556,65.464 ; JP1.8@93.658,66.362 ccw(c92.574,67.446) 94.107,67.446 ccw(c95.64,67.446) JP1.8@94.556,66.362 ; JP1.6@93.658,68.004 cw(c92.574,66.92) 94.107,66.92 cw(c95.64,66.92) JP1.6@94.556,68.004 ; JP1.6@93.658,68.902 ccw(c92.574,69.986) 94.107,69.986 ccw(c95.64,69.986) JP1.6@94.556,68.902 ; JP1.4@93.658,70.544 cw(c92.574,69.46) 94.107,69.46 cw(c95.64,69.46) JP1.4@94.556,70.544 ; JP1.10@93.66,62.922 cw(c92.596,61.849) 94.107,61.849 ; JP1.10@93.874,63.606 ccw(c93.31,64.17) 94.107,64.17 ccw(c94.904,64.17) JP1.10@94.34,63.606 ; JP1.8@93.874,65.68 cw(c93.31,65.116) 94.107,65.116 cw(c94.904,65.116) JP1.8@94.34,65.68 ; JP1.8@93.874,66.146 ccw(c93.31,66.71) 94.107,66.71 ccw(c94.904,66.71) JP1.8@94.34,66.146 ; JP1.6@93.874,68.22 cw(c93.31,67.656) 94.107,67.656 cw(c94.904,67.656) JP1.6@94.34,68.22 ; JP1.6@93.874,68.686 ccw(c93.31,69.25) 94.107,69.25 ccw(c94.904,69.25) JP1.6@94.34,68.686 ; JP1.4@93.874,70.76 cw(c93.31,70.196) 94.107,70.196 cw(c94.904,70.196) JP1.4@94.34,70.76 ; JP1.10@93.875,63.139 cw(c93.321,62.581) 94.107,62.581 cw(c94.893,62.581) JP1.10@94.339,63.139 ; JP1.4@94.107,70.993 94.107,61.849 ; JP1.10@94.554,62.922 ccw(c95.618,61.849) 94.107,61.849 ; 74.803,68.707 77.47,68.707 77.978,69.215 ; 76.581,60.198 92.456,60.198 94.107,61.849
  Top Layer w0.381: C14.1@21.784,63.059 cw(c21.025,62.3) 22.098,62.3 cw(c23.171,62.3) C14.1@22.412,63.059 ; C14.1@22.098,63.373 22.098,61.595 26.67,57.023 v1(31.115,57.023) ; v1@30.801,56.709 ccw(c30.042,55.95) 30.042,57.023 ccw(c30.042,58.096) v1@30.801,57.337 ; C11.1@33.655,45.593 C11.1@33.655,46.101 ; v1@43.501,34.604 ccw(c42.742,35.363) 43.815,35.363 ccw(c44.888,35.363) v1@44.129,34.604 ; C1.1@43.501,35.5 cw(c42.742,34.741) 43.815,34.741 cw(c44.888,34.741) C1.1@44.129,35.5 ; v1(43.815,34.29) C1.1@43.815,35.941 C2.1@48.895,35.941 ; C1.1@44.129,35.627 cw(c44.888,34.868) 44.888,35.941 cw(c44.888,37.014) C1.1@44.129,36.255 ; C2.1@48.581,35.627 ccw(c47.822,34.868) 47.822,35.941 ccw(c47.822,37.014) C2.1@48.581,36.255
  Top Layer w0.508: U2.5@42.838,51.289 44.05,51.289 44.45,51.689 ; U2.3@42.838,52.889 44.266,52.889 44.45,52.705 44.45,51.689 ; U2.19@50.888,50.489 49.714,50.489 49.276,50.927 49.276,51.689 ; 61.078,57.159 cw(c59.826,55.908) C10.2@61.595,55.85 ; C10.2@61.359,56.153 ccw(c60.972,56.642) 61.595,56.642 ; C3.2@61.595,49.657 64.262,49.657 v1(65.151,50.546) ; C10.2@61.831,56.153 cw(c62.218,56.642) 61.595,56.642 ; C3.2@61.991,49.388 cw(c62.642,48.737) 62.642,49.657 cw(c62.642,50.577) C3.2@61.991,49.926 ; C10.2@61.991,55.585 cw(c62.642,54.935) 62.642,55.855 cw(c62.642,56.774) C10.2@61.991,56.124 ; v1@64.77,50.546 cw(c63.85,50.546) 64.501,49.896 cw(c65.151,49.245) v1@65.151,50.165 ; v1@65.569,55.155 ccw(c66.272,55.858) 66.272,54.864 ; v1@65.928,55.514 ccw(c67.499,57.085) C5.2@67.499,54.864 ; C5.2@67.549,54.595 ccw(c66.898,53.944) 66.898,54.864 ccw(c66.898,55.784) C5.2@67.549,55.133 ; C5.2@67.549,55.26 ccw(c66.898,55.911) 67.818,55.911 ccw(c68.738,55.911) C5.2@68.087,55.26 ; C5.2@67.818,54.864 67.818,56.388 70.383,58.953 ; C5.2@68.087,54.595 cw(c68.738,53.944) 68.738,54.864 cw(c68.738,55.784) C5.2@68.087,55.133 ; 69.841,54.864 ccw(c69.841,56.651) Q1.2@71.105,55.387 ; 71.202,58.953 ccw(c71.202,60.406) v1@72.504,59.761 ; Q1.2@71.374,55.118 71.12,54.864 65.278,54.864 64.287,55.855 C10.2@61.595,55.855 61.595,56.642 ; 72.021,58.953 ccw(c72.021,60) 72.959,59.535 ; v1@72.049,59.986 cw(c70.383,60.812) 70.383,58.953 ; 73.254,58.953 70.383,58.953 ; C17.1@86.995,22.225 90.551,22.225 ; C17.1@87.391,21.956 cw(c88.042,21.305) 88.042,22.225 cw(c88.042,23.145) C17.1@87.391,22.494 ; 88.913,22.225 ccw(c88.913,24.879) D3.2@90.79,23.002 ; 90.139,22.225 ccw(c90.139,23.653) D3.2@91.149,22.643 ; D3.2@90.685,22.661 cw(c90.207,22.569) 90.551,22.225 ; D3.2@90.987,22.359 ccw(c90.895,21.881) 90.551,22.225 ; D3.2@91.059,22.733 90.551,22.225 ; 44.45,51.689 49.276,51.689 ; 49.276,51.689 49.676,52.089 55.899,52.089 56.388,52.578 56.388,55.88 58.039,57.531 60.706,57.531 61.595,56.642
  Top Layer w0.762: J4.1@16.503,68.319 cw(c15.873,67.689) 16.764,67.689 cw(c17.655,67.689) J4.1@17.025,68.319 ; J4.1@16.764,68.58 16.764,65.532 18.923,63.373 C14.1@22.098,63.373 ; v1(31.623,61.849) C4.2@33.401,61.849
  Top Layer w1.016: Q2.3@29.083,13.106 29.083,11.684 29.718,11.049 35.687,11.049 ; Q2.3@29.137,12.565 ccw(c29.868,12.114) 29.261,11.506 ; U4.8@35.687,24.003 35.687,21.844 34.036,20.193 34.036,17.526 35.687,15.875 35.687,11.049 ; 39.841,6.895 ccw(c41.402,8.456) C13.2@41.402,6.248 ; C13.2@41.656,5.969 40.767,5.969 35.687,11.049 ; v1(77.851,28.702) R19.1@77.851,30.861
  Top Layer w1.27: R33.1@43.307,15.621 43.307,13.081 43.942,12.446 43.942,7.747 ; D8.1@61.982,25.66 cw(c60.465,24.143) 62.611,24.143 cw(c64.757,24.143) D8.1@63.24,25.66 ; D8.1@62.611,26.289 62.611,23.876 64.262,22.225 C18.1@67.691,22.225
  Top Layer w2.54: DZ1.1@19.558,48.641 19.558,45.72 20.955,44.323 25.527,44.323 29.972,39.878 D5.1@32.131,39.878 ; R28.1@28.829,22.987 35.179,22.987 35.941,23.749 35.941,33.401 32.131,37.211 D5.1@32.131,39.878 ; 28.879,40.971 ccw(c32.131,44.223) D5.1@32.131,39.624 ; D7.1@32.131,36.068 cw(c32.131,33.309) 34.082,35.26 ; D5.1@32.311,39.698 ccw(c30.598,41.411) 33.02,41.411 ; C11.1@33.02,45.593 33.02,40.767 D5.1@32.131,39.878 ; DZ2.1@19.378,44.905 ccw(c20.784,46.311) 20.784,44.323 cw(c20.784,46.311) DZ2.1@19.378,44.905
  Bottom Layer w0.305: v1(31.115,57.023) 31.369,56.769 33.401,56.769 ; v1@31.241,57.149 ccw(c32.157,58.065) 32.157,56.769 ; v1@31.456,57.364 ccw(c32.893,58.801) 32.893,56.769 ; D5.1@32.131,39.878 33.401,41.148 ; D5.1@32.193,40.433 ccw(c32.296,41.357) 32.953,40.7 ccw(c33.61,40.043) D5.1@32.686,39.94 ; D5.1@32.227,40.736 ccw(c32.386,42.163) 33.401,41.148 ; D5.1@32.989,39.974 cw(c34.416,40.133) 33.401,41.148 ; 33.401,60.071 33.401,41.148 ; v1@72.049,60.158 ccw(c71.225,60.982) 72.39,60.982 ccw(c73.555,60.982) v1@72.731,60.158 ; v1(72.39,59.817) 72.39,66.294 v1(74.041,67.945) ; v1@73.558,67.945 cw(c72.393,67.945) 73.217,67.121 cw(c74.041,66.297) v1@74.041,67.462
  Bottom Layer w0.381: D7.1@32.131,34.989 cw(c32.131,32.996) 33.54,34.405 cw(c34.949,35.814) D7.1@32.956,35.814 ; D7.1@32.131,35.369 cw(c32.131,34.296) 32.89,35.055 cw(c33.649,35.814) D7.1@32.575,35.814 ; D7.1@32.131,35.814 33.655,34.29 v1(43.815,34.29) 43.307,34.798 ; v1@43.393,34.431 ccw(c43.054,34.545) 43.307,34.798 ; v1@43.501,33.976 ccw(c42.742,33.217) 42.742,34.29 ccw(c42.742,35.363) v1@43.501,34.604 ; v1@43.674,34.712 cw(c43.56,35.051) 43.307,34.798
  Bottom Layer w0.508: D8.1@61.717,27.191 ccw(c59.589,29.337) 62.611,29.337 ; D8.1@62.074,26.83 ccw(c60.798,28.118) 62.611,28.118 ccw(c64.424,28.118) D8.1@63.148,26.83 ; D8.1@62.611,26.289 62.611,29.337 ; D8.1@63.505,27.191 cw(c65.633,29.337) 62.611,29.337 ; v1@64.882,50.277 cw(c63.005,48.4) 65.659,48.4 ; v1@64.882,50.815 ccw(c63.005,52.692) 65.659,52.692 ; v1@65.241,50.456 ccw(c64.231,51.466) 65.659,51.466 ; v1@65.241,50.636 cw(c64.231,49.626) 65.659,49.626 ; v1@65.39,54.976 cw(c64.739,54.325) 65.659,54.325 cw(c66.579,54.325) v1@65.928,54.976 ; v1(65.659,55.245) 65.659,32.385 62.611,29.337 ; U6.2@76.97,22.352 cw(c76.098,21.463) 77.343,21.463 ; U6.2@77.343,22.733 77.343,21.463 ; U6.2@77.716,22.352 ccw(c78.588,21.463) 77.343,21.463 ; D3.2@90.678,22.733 cw(c89.758,22.733) 90.409,22.083 cw(c91.059,21.432) D3.2@91.059,22.352 ; D3.2@91.059,22.733 89.154,20.828 77.978,20.828 77.343,21.463
  Bottom Layer w0.762: v1(31.623,61.849) 33.401,60.071
  Bottom Layer w1.016: 60.697,24.121 ccw(c58.529,26.289) D8.1@61.595,26.289 ; 61.31,24.734 cw(c62.611,23.433) D8.1@62.611,25.273 ; D8.1@63.329,25.571 cw(c65.064,23.836) 65.064,26.289 cw(c65.064,28.742) D8.1@63.329,27.007 ; C15.2@64.135,5.969 59.944,10.16 59.944,23.368 62.611,26.035 D8.1@62.611,26.289 75.565,26.289 77.343,24.511 U6.2@77.343,22.733 ; 75.438,26.289 v1(77.851,28.702)
  other v1: 11.303,10.668 11.176,16.129 68.707,43.688 25.527,59.563 26.67,65.278
IN+: C9.1 J3.1 R15.2 | length 26.8
  Top Layer w0.508: C9.1@75.296,43.729 ccw(c74.645,44.379) 75.565,44.379 ccw(c76.485,44.379) C9.1@75.834,43.729 ; C9.1@75.565,43.459 75.565,44.577 75.946,44.958 77.216,44.958 77.851,45.593 R15.2@77.851,46.558 R15.2@78.359,46.558 ; R15.2@77.582,46.289 cw(c76.931,45.638) 77.851,45.638 cw(c78.771,45.638) R15.2@78.12,46.289 ; J3.1@89.662,40.386 J3.1@89.916,40.132
  Top Layer w2.54: R15.2@78.359,46.228 83.185,46.228 89.281,40.132 J3.1@89.408,40.132 ; 87.091,42.322 ccw(c89.408,44.638) J3.1@89.408,41.362 ; 87.398,42.015 cw(c85.515,40.132) J3.1@88.178,40.132
IN-: J3.2 R14.2 | length 15.9
  Top Layer w0.508: R14.2@77.851,49.657 R14.2@78.486,49.657 ; J3.2@89.154,49.657 89.441,49.657 J3.2@89.916,50.132
  Top Layer w2.54: R14.2@78.486,49.657 J3.2@89.154,49.657 ; 85.292,49.657 ccw(c85.292,54.248) J3.2@88.538,51.002